# Altium PCB Board22.PcbDoc
Units mm, origin at the board's own origin, x right, y up, seen from the top; angles counter-clockwise.
Board outline 45 x 60 mm, 2 copper layers (Top Layer, Bottom Layer); 20 components, 21 nets, 61 pads, 10 vias.
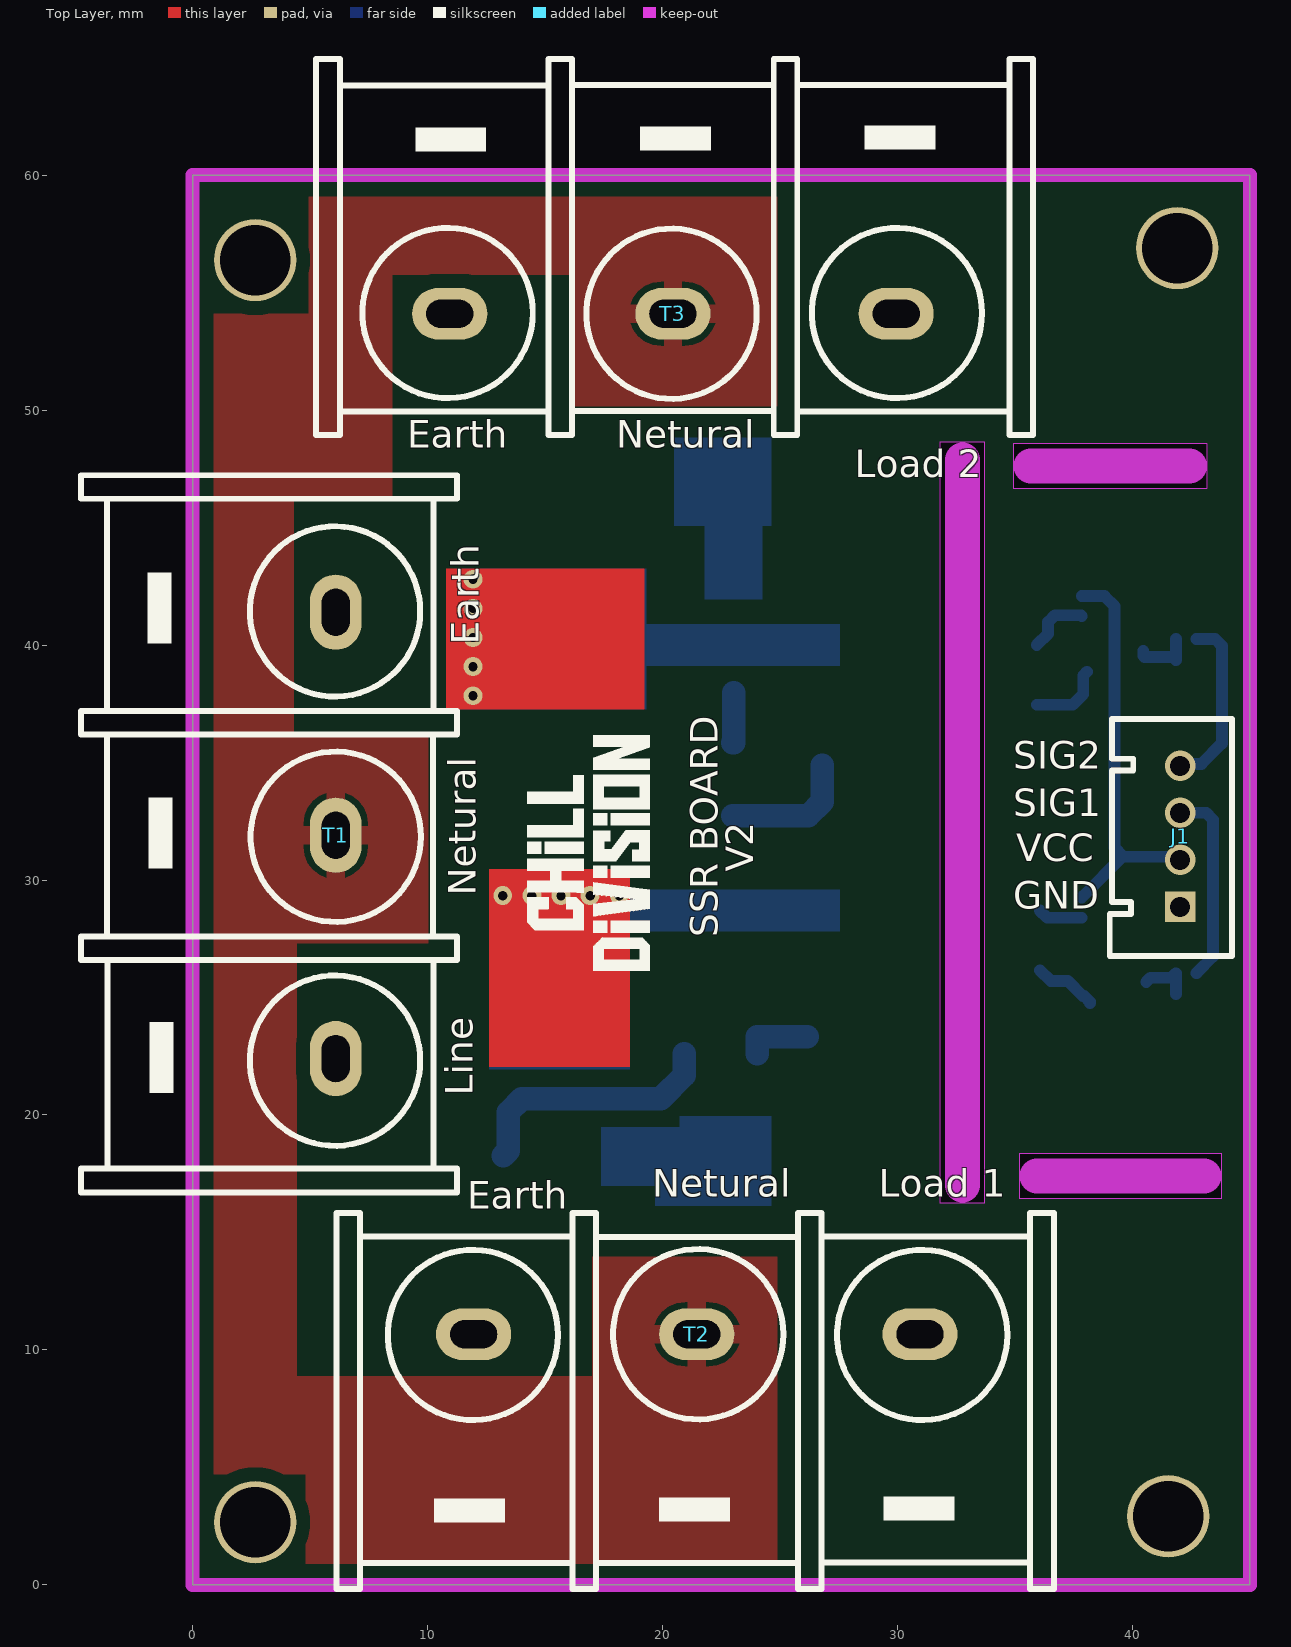
[diagram p0: Top Layer view]
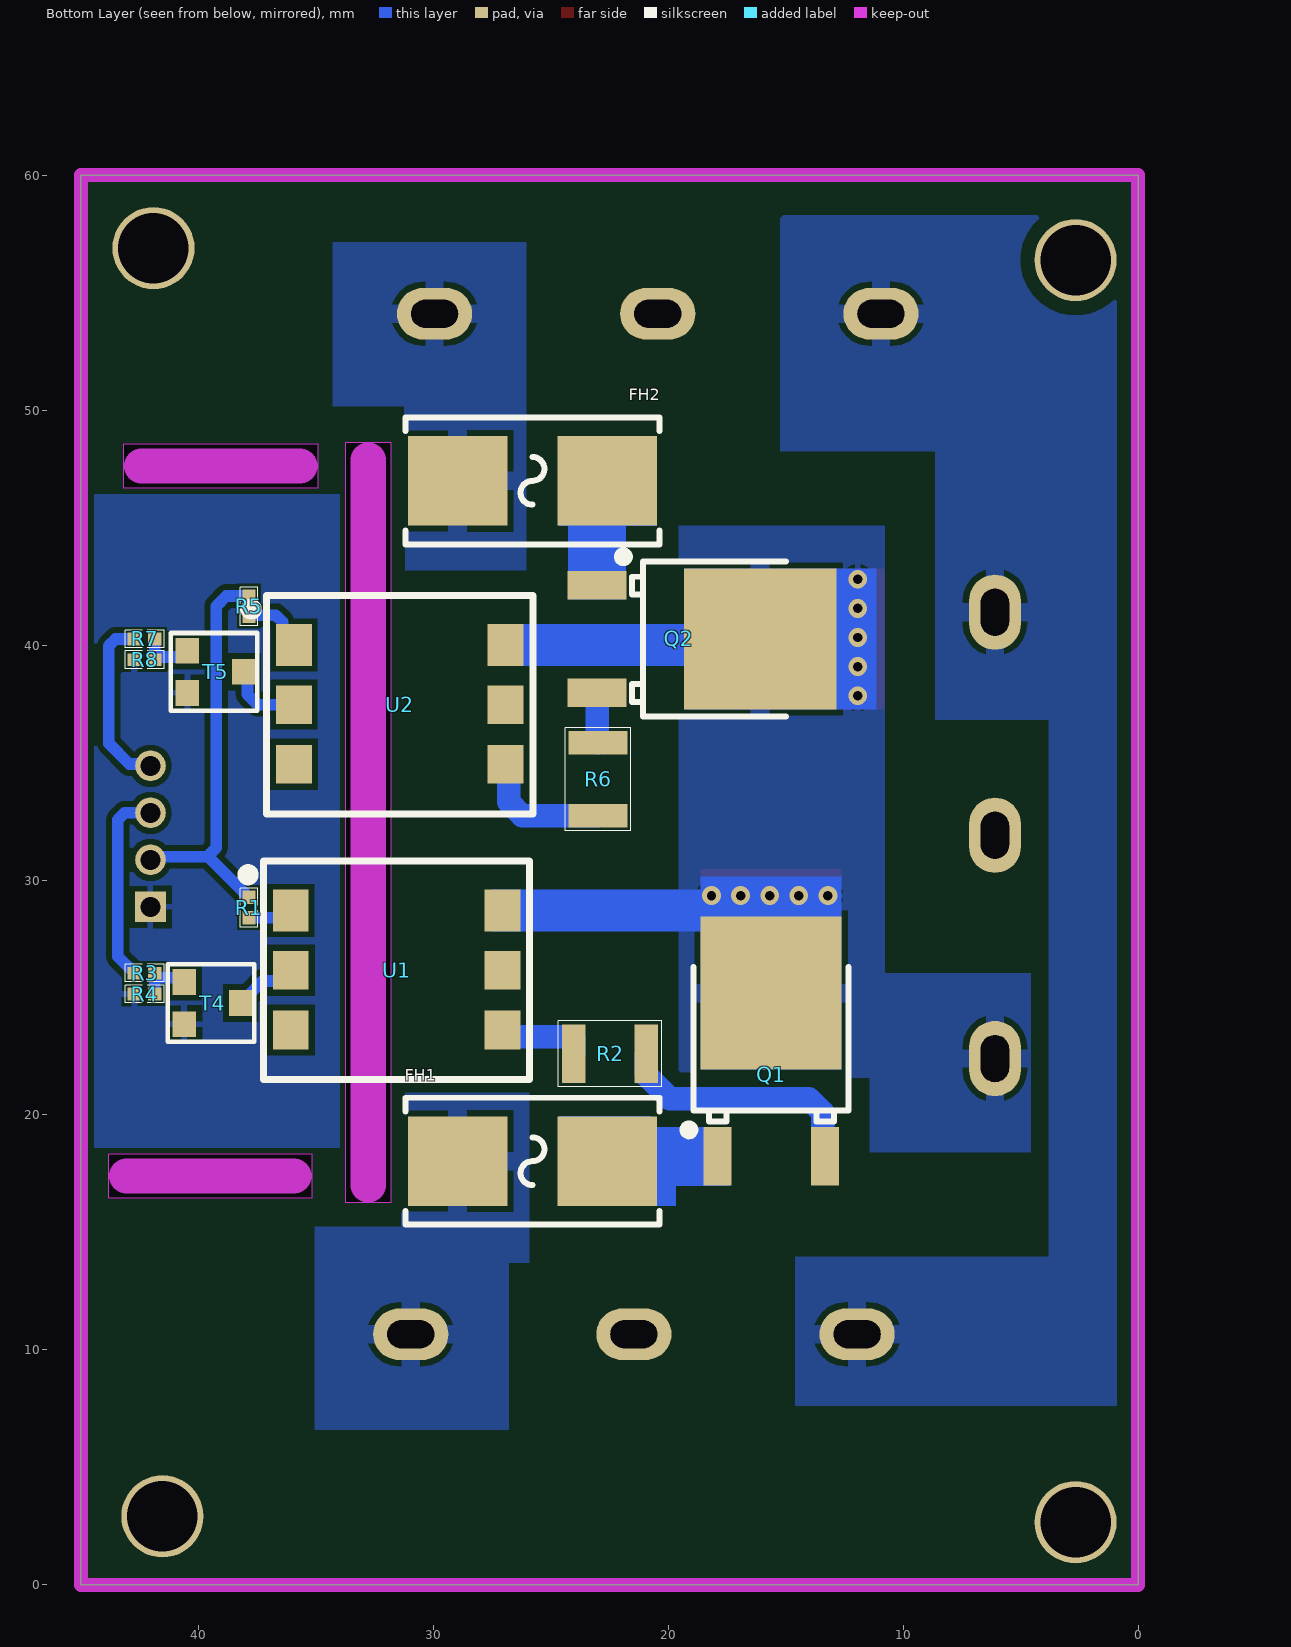
[diagram p1: Bottom Layer view, seen from below]
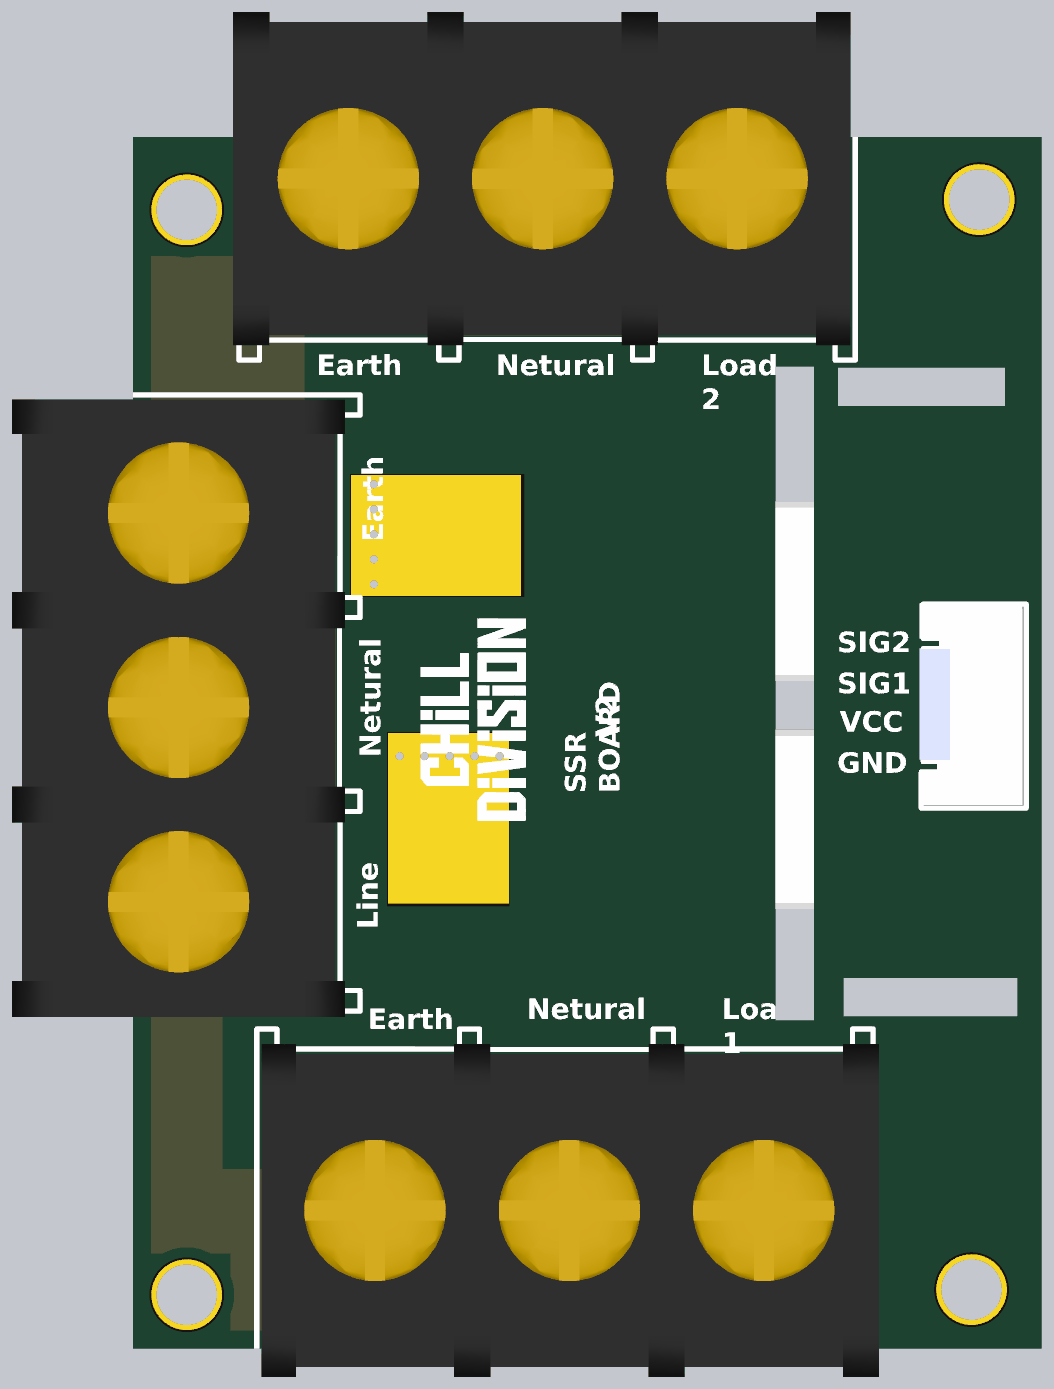
[diagram p2: 3D render of the assembled board from above, using the file's embedded part models]
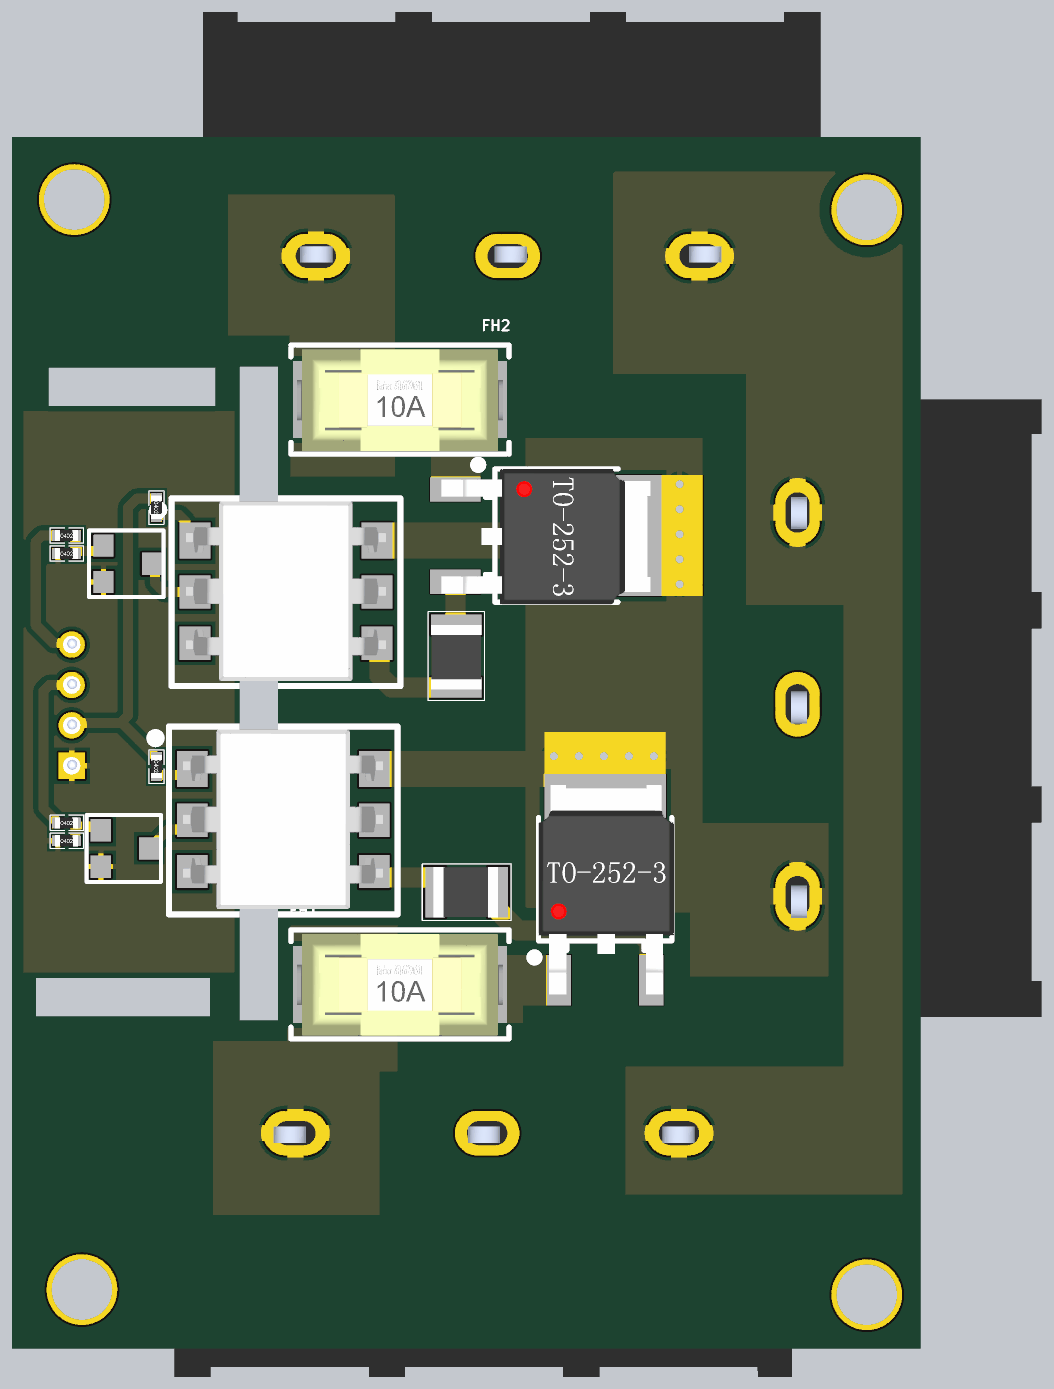
[diagram p3: 3D render of the assembled board from below, using the file's embedded part models]

## Layer stack, top to bottom
Top Solder: solder mask 0.0102, Solder Resist, Dk 3.5
Top Layer: signal copper 0.0356
Dielectric 1: dielectric 0.32, FR-4, Dk 4.8
Bottom Layer: signal copper 0.0356
Bottom Solder: solder mask 0.0102, Solder Resist, Dk 3.5

## Board outline
0,0 0,60 45,60 45,0
cut-out: 34.925,48.578 34.925,46.672 43.18,46.672 43.18,48.578
cut-out: 35.179,18.351 35.179,16.447 43.815,16.447 43.815,18.351
cut-out: 33.718,48.641 31.813,48.641 31.813,16.256 33.718,16.256

## Design rules (kind name [scope] priority, off if disabled: settings)
Clearance Clearance_1 [InNamedPolygon('NETURAL_L01_P004') Or InNamedPolygon('EARTH_L02_P001') Or InNamedPolygon('LINE_L02_P000') Or InNamedPolygon('LOAD_1_L02_P003') Or InNamedPolygon('LOAD_2_L02_P002')] p1: gap=0.6 ignorepadtopadclearanceinfootprint=FALSE
Clearance [All] p2: gap=0.254 ignorepadtopadclearanceinfootprint=FALSE except(0: Arc-Hole Track-Hole SMDPad-Hole THPad-Hole Via-Hole Fill-Hole Poly-Hole Region-Hole Text-Hole)
PolygonConnect PolygonConnect_1 [All vs IsNamedPolygon('NETURAL_L01_P004') Or IsNamedPolygon('EARTH_L02_P001') Or IsNamedPolygon('LINE_L02_P000') Or IsNamedPolygon('LOAD_1_L02_P003') Or IsNamedPolygon('LOAD_2_L02_P002')] p1: thpad.connectstyle=Relief thpad.reliefconductorwidth=0.8 thpad.reliefentries=4 thpad.polygonreliefangle="90 Angle" thpad.airgapwidth=0.254 smdpad.connectstyle=Relief smdpad.reliefconductorwidth=0.8 smdpad.reliefentries=4 smdpad.polygonreliefangle="90 Angle" smdpad.airgapwidth=0.254 via.connectstyle=Relief via.reliefconductorwidth=0.254 via.reliefentries=4 via.polygonreliefangle="90 Angle" via.airgapwidth=0.254
PolygonConnect [All] p2: connectstyle=Relief reliefconductorwidth=0.254 reliefentries=4 polygonreliefangle="90 Angle" airgapwidth=0.254
RoutingVias [All] p1: holewidth=0.711 width=1.27 viastyle="Through Hole" minholewidth=0.711 minwidth=1.27 maxholewidth=0.711 maxwidth=1.27
SolderMaskExpansion [All] p1: expansion=0.102 istentingtop=FALSE
Width [All] p1: maxlimit=2 minlimit=0.4 preferedwidth=1
30 further rules are at their usual default settings.

## Components (designator, comment, footprint, x,y, rotation, side; value= is the part's Value field where it differs from the comment)
FH1 "XF-154" FUSE-SMD_L10.5-W5.1 25.781,18.034 r180 bottom
FH2 "XF-154" FUSE-SMD_L10.5-W5.1 25.781,46.99 r180 bottom
J1 "Header 4P*2mm" CONN-TH_4P-P2.00_HX20020-4A_2 42.037,28.861 r270 top
Q1 "BT136S-800E,118" TO-252-3_L6.6-W6.1-P4.57-LS9.9-BR-CW 15.621,21.717 r270 bottom
Q2 "BT136S-800E,118" TO-252-3_L6.6-W6.1-P4.57-LS9.9-BR-CW 19.558,40.259 r0 bottom
R1 "0402 Resistor" R0402 37.846,28.829 r270 bottom
R2 "330R / 0.5W" R1210 22.479,22.606 r0 bottom
R3 "0402 Resistor" R0402 42.291,26.035 r180 bottom
R4 "0402 Resistor" R0402 42.291,25.146 r180 bottom
R5 "0402 Resistor" R0402 37.846,41.656 r270 bottom
R6 "330R / 0.5W" R1210 22.987,34.29 r270 bottom
R7 "0402 Resistor" R0402 42.291,40.259 r180 bottom
R8 "0402 Resistor" R0402 42.291,39.37 r180 bottom
T1 "Header 3P*9.5mm" "3P,9.5mm Terminal Block" 6.096,31.902 r270 top
T2 "Header 3P*9.5mm" "3P,9.5mm Terminal Block" 21.463,10.668 r0 top
T3 "Header 3P*9.5mm" "3P,9.5mm Terminal Block" 20.447,54.102 r180 top
T4 "MMBT3904 Transistor" MMBT3904 39.395,24.765 r180 bottom
T5 "MMBT3904 Transistor" MMBT3904 39.268,38.862 r180 bottom
U1 "MOC3051SM" OPTOTRIAC_SMD_6PIN 31.563,26.162 r270 bottom
U2 "MOC3051SM" OPTOTRIAC_SMD_6PIN 31.429,37.465 r270 bottom

## Footprints (in the part's own frame and the unit in brackets; to place one, negate y for a bottom-side part, rotate by r counter-clockwise, add the part's x,y. Pads: shape width x height; smd on the part's side, far side on the other; paste and mask are expansions set on the pad)
"3P,9.5mm Terminal Block" [mm]
  oval 3.2x2.2 hole 1.2 slot 2 at 0 deg: 1(-9.5,0) 2(0,0) 3(9.5,0)
  silkscreen extent -15.33,-10.85 15.19,5.16, body extent -15.08,-12.08 15.49,4.42, height 18.5
CONN-TH_4P-P2.00_HX20020-4A_2 [mm]
  rect 1.3x1.3 hole 0.85: 1(0,0)
  round 1.3 hole 0.85: 2(-2,0) 3(-4,0) 4(-6,0)
  silkscreen extent -8,-3 2.1,2.2, body extent -8.05,-3.08 1.95,2.02, height 8
FUSE-SMD_L10.5-W5.1 [mm]
  rect 4.24x3.81 smd paste+0 mask+0: 1(-3.185,0) 2(3.185,0)
  silkscreen extent -5.4,-2.7 5.4,2.7, body extent -5.11,-2.54 5.1,2.49, height 7.46
MMBT3904 [mm] "SOT23, 3-Leads, Body 2.90x2.45mm, Pitch 0.90mm, IPC Medium Density"
  rect 1x1.1 smd: B(-1.2,0.9) C(1.2,0) E(-1.2,-0.9)
  silkscreen extent -1.91,-1.65 1.78,1.65, body extent -0.7,-1.5 0.7,1.5, height 1.1
OPTOTRIAC_SMD_6PIN [mm]
  rect 1.78x1.52 smd mask+0.102: 1(-2.54,-4.505) 6(-2.54,4.505)
  rect 1.65x1.52 smd mask+0.102: 2(0,-4.505) 3(2.54,-4.505) 4(2.54,4.505) 5(0,4.505)
  silkscreen extent -4.64,-6.52 4.66,5.66, body extent -4.48,-4.95 4.41,4.95, height 5.93
R0402 [mm]
  rect 0.566x0.54 smd paste-100 mask+0.051: 1(-0.433,0) 2(0.433,0)
  silkscreen extent -0.81,-0.37 0.84,0.38, body extent -0.58,-0.28 0.58,0.28, height 0.41
R1210 [mm] "Chip Capacitor, 2-Leads, Body 4.35x3.15mm, IPC Medium Density"
  rect 1x2.5 smd mask+0.102: 1(-1.55,0) 2(1.55,0)
  silkscreen extent -2.2,-1.4 2.2,1.4, body extent -1.55,-1.25 1.65,1.25, height 1.5
TO-252-3_L6.6-W6.1-P4.57-LS9.9-BR-CW [mm]
  rect 2.5x1.2 smd paste+0 mask+0.05: 1(3.475,-2.286) 3(3.475,2.286)
  rect 6.5x6 smd paste+0 mask+0.05: 2(-3.475,0)
  silkscreen extent -4.57,-3.7 2.55,3.3, body extent -6.18,-3.3 4.17,3.4, height 2.41

## Part data
FH1 FH2: "C41371861  ,  C136382", JLCPCB Part Class="Extended Part", Manufacturer=XFCN(兴飞), Add into BOM=yes, Convert to PCB=yes, Datasheet=https://atta.szlcsc.com/upload/public/pdf/source/20240828/54540296E604CB321541E8B6C3E496A3.pdf, Device=XF-154, LCSC Part Name=XF-154, Manufacturer Part=XF-154, Supplier=LCSC, Supplier Footprint=SMD, Supplier Part=C41371861, Symbol=XF-154
J1: library part ZX-HY2.0-4PZZ, "C42372479", Colour=White, Current Rating (Max)=2A, Flame Retardant Rating=UL94V-0, JLCPCB Part Class="Extended Part", LCSC Part Name="1x4P 间距:2mm 直插 系列:HY 配套胶壳型号：ZX-HY2.0-4PJK 配套端子型号：ZX-HY2.0-DZ 配套杜邦线型号：ZX-HY2.0-4PBXC", Manufacturer=Megastar(兆星), Operating Temperature Range=-25℃~+85℃, Rated Voltage (Max)=250V, Add into BOM=yes, Contact Material=Brass, Contact Plating=Tin, Convert to PCB=yes, Datasheet=https://atta.szlcsc.com/upload/public/pdf/source/20241025/5A7CD93910E89EF197073334521200FC.pdf, Device=ZX-HY2.0-4PZZ, Manufacturer Part=ZX-HY2.0-4PZZ, Mounting Style="Direct Insert", Number of Pins=4P, Number of PINs Per Row=4, Number of Rows=1, Pins Structure=1x4P, Pitch=2mm, Plastic Material=-, Reference Series=HY, Row Spacing=-, Supplementary Features=-, Supplier=LCSC, Supplier Footprint=插件,P=2mm, Supplier Part=C7429580, Symbol=ZX-HY2.0-4PZZ, X-Length of Bottom Edge on Board (Spacing Line)=10mm, Y-Width of Bottom Edge on Board=5.1mm, Z-Height of the Board=8mm
Q1 Q2: "Triac", Gate Trigger   Voltage (Vgt)=1.5V, Gate Trigger Current(Igt)=10mA, Holding Current (Ih)=15mA, JLCPCB Part Class="Extended Part", Manufacturer=WeEn(瑞能), Operating Temperature=-, Peak Repetitive Off?State Voltage (Vdrm)=800V, RMS On-State Current(It (rms))=4A, Add into BOM=yes, Convert to PCB=yes, Datasheet=https://atta.szlcsc.com/upload/public/pdf/source/20200604/C581422_C791797B81F6B31C38BE664CA17CBB1A.pdf, Device=BT136S-800E,118, LCSC Part Name=BT136S-800E,118, Manufacturer Part=BT136S-800E,118, SCR Type=-, Supplier=LCSC, Supplier Footprint=DPAK, Supplier Part=C581422, Symbol=BT136S-800E,118
R2 R6: library part AC1210FR-07330RL, "C2933817", Case Code (Imperial)=1210, Case Code (Metric)=3225, Manufacturer=Yageo, Max Operating Temperature=155°C, Max Power Dissipation=500mW, Min Operating Temperature=-55°C, Resistance=330R, Supplier Part Number 1=603-AC1210FR-07330RL, Temperature Coefficient=100ppm/°C, Tolerance=1%, Voltage Rating=200V, Case/Package=1210, Category="Chip SMD Resistors", ComponentLink1Description=http://www.mouser.com/ds/2/447/yageodocoutput-1111992.pdf?src-supplier=Mouser, ComponentLink1URL=http://www.mouser.com/ds/2/447/yageodocoutput-1111992.pdf?src-supplier=Mouser, ComponentLink2Description=http://www.yageo.com/NewPortal/yageodocoutput?fileName=/pdf/R-Chip/PYu-AC_51_RoHS_L_6.pdf&src-supplier=Digi-Key, ComponentLink2URL=http://www.yageo.com/NewPortal/yageodocoutput?fileName=/pdf/R-Chip/PYu-AC_51_RoHS_L_6.pdf&src-supplier=Digi-Key, Features="Moisture Resistant,Automotive AEC-Q200", Height=0.024inch, Length=0.122inch, Manufacturer Part Number=AC1210FR-07330RL, Number of Terminations=2, Packaging="Tape and Reel", Power Rating=500mW, Pricing 1="1=0.30000, 10=0.19100, 50=0.19100, 100=0.06200, 1000=0.04300, 10000=0.03100 (USD)", RoHS=Yes, RoHS Compliant=Yes, Series=AC, Stock 1=2010, Supplier 1=Mouser, Termination=SMD/SMT, Width=2.6mm
T1 T2 T3: library part WJ45C-B-9.5-3P, "C8442", Colour=White, Current Rating (Max)=2A, Flame Retardant Rating=UL94V-0, JLCPCB Part Class="Extended Part", LCSC Part Name="1x4P 间距:2mm 直插 系列:HY 配套胶壳型号：ZX-HY2.0-4PJK 配套端子型号：ZX-HY2.0-DZ 配套杜邦线型号：ZX-HY2.0-4PBXC", Manufacturer=Megastar(兆星), Manufacturer Part=ZX-HY2.0-4PZZ, Operating Temperature Range=-25℃~+85℃, Rated Voltage (Max)=250V, Add into BOM=yes, Contact Material=Brass, Contact Plating=Tin, Convert to PCB=yes, Datasheet=https://atta.szlcsc.com/upload/public/pdf/source/20241025/5A7CD93910E89EF197073334521200FC.pdf, Device=ZX-HY2.0-4PZZ, Mounting Style="Direct Insert", Number of Pins=4P, Number of PINs Per Row=4, Number of Rows=1, Pins Structure=1x4P, Pitch=2mm, Plastic Material=-, Reference Series=HY, Row Spacing=-, Supplementary Features=-, Supplier=LCSC, Supplier Footprint=插件,P=2mm, Supplier Part=C7429580, Symbol=ZX-HY2.0-4PZZ, X-Length of Bottom Edge on Board (Spacing Line)=10mm, Y-Width of Bottom Edge on Board=5.1mm, Z-Height of the Board=8mm
U1 U2: "Triac Driver Optocoupler, 6-Pin DIP Random-Phase", Case/Package=SMD/SMT, Forward Current=60mA, Forward Voltage=1.18V, Hold Current=220uA, Isolation Voltage=7.5kV, Manufacturer="ON Semiconductor / Fairchild", Max Input Voltage=1.5V, Max Operating Temperature=85°C, Min Operating Temperature=-40°C, Nominal Input Voltage=1.15V, Package Quantity=1000, Power Dissipation=330mW, Reverse Breakdown Voltage=3V, Supplier Part Number 1=512-MOC3051SM, Approvals=UR, Category=Optocouplers, ComponentLink1Description=https://datasheet.ciiva.com/8097/moc3052m-8097782.pdf?src-supplier=Avnet, ComponentLink1URL=https://datasheet.ciiva.com/8097/moc3052m-8097782.pdf?src-supplier=Avnet, ComponentLink2Description=https://datasheet.ciiva.com/17022/moc3051m-17022507.pdf?src-supplier=Future+Electronics, ComponentLink2URL=https://datasheet.ciiva.com/17022/moc3051m-17022507.pdf?src-supplier=Future+Electronics, Isolation Voltage-Max=7.5kV, Lead Free="Lead Free", Manufacturer Part Number=MOC3051SM, Mount="Surface Mount", Number of Channels=1, Number of Circuits=1, Number of Elements=1, Number of Pins=6, Packaging=Bulk, Pricing 1="1=1.20000, 10=0.76100, 50=0.76100, 100=0.56400, 1000=0.40000, 10000=0.38200 (USD)", Radiation Hardening=No, RoHS=Yes, RoHS Compliant=Yes, Series=-, Stock 1=1665, Supplier 1=Mouser, Weight=0.81g
T4 T5: Created By=NourAldin

## Free pads (board coordinates)
  round 3.5 hole 3: ""(2.667,2.667) ""(2.667,56.388) ""(41.529,2.921) ""(41.91,56.896)

## Via types
v1: diameter 0.8, hole 0.4, Top Layer to Bottom Layer, 10 vias

## Nets (pads, with @x,y where several pads share a name; then routed paths per layer and width w, separated by ;. In a path a pad name is that pad's centre, name@x,y a point inside that pad or via, vN(x,y) a via of type N, cw(c..) or ccw(c..) an arc to the next point about the centre after c; other vN are vias at no path point)
Earth: T1.1 T2.1 T3.3
GND: J1.1 R4.1 R8.1 T4.E T5.E
Line: Q1.2 Q2.2 T1.3 U1.6 U2.6
  other v1: 13.208,29.337 14.446,29.337 15.684,29.337 16.923,29.337 18.161,29.337 11.938,37.846 11.938,39.084 11.938,40.322 11.938,41.561 11.938,42.799
"Load 1": FH1.1 T2.3
"Load 2": FH2.1 T3.1
NetFH1_2: FH1.2 Q1.1
NetFH2_2: FH2.2 Q2.1
NetQ1_3: Q1.3 R2.1 | length 11
  Bottom Layer w1: Q1.3@13.235,18.271 13.433,18.469 13.433,20.115 14.019,20.701 19.939,20.701 20.929,21.691 R2.1
NetQ2_3: Q2.3 R6.1 | length 2.2
  Bottom Layer w1: R6.1 23.033,35.84 Q2.3
NetR1_2: R1.2 U1.1 | length 1.9
  Bottom Layer w0.5: U1.1 36.374,28.396 R1.2
NetR2_2: R2.2 U1.4 | length 2.9
  Bottom Layer w1: R2.2 24.029,23.331 26.169,23.331
NetR3_2: R3.2 R4.2 T4.B | length 2.3
  Bottom Layer w0.5: T4.B 40.769,25.839 41.649,25.839 41.845,26.035 R3.2 R4.2
NetR5_2: R5.2 U2.1 | length 2.8
  Bottom Layer w0.5: U2.1 36.412,40.483 36.412,40.982 36.705,41.275 37.794,41.275 37.813,41.256 37.826,41.256 37.846,41.236 R5.2
NetR6_2: R6.2 U2.4 | length 5.6
  Bottom Layer w1: R6.2 26.211,32.74 26.797,33.326 U2.4@26.797,34.893
NetR7_2: R7.2 R8.2 T5.B | length 2.6
  Bottom Layer w0.5: T5.B 40.468,39.542 40.513,39.497 41.718,39.497 41.845,39.37 R8.2 R7.2
NetT4_C: T4.C U1.2 | length 2.7
  Bottom Layer w0.5: U1.2 36.526,25.704 37.256,25.704 37.895,25.065 37.945,25.065 38.195,24.815 T4.C
NetT5_C: T5.C U2.2 | length 3.2
  Bottom Layer w0.5: U2.2 37.465,37.465 37.91,37.91 37.91,38.703 T5.C
Netural: T1.2 T2.2 T3.2
Signal1: J1.3 R3.1 | length 8.4
  Bottom Layer w0.5: J1.3 43.141,32.861 43.434,32.568 43.434,26.745 42.757,26.068 42.757,26.055 42.737,26.035 R3.1
Signal2: J1.4 R7.1 | length 7.5
  Bottom Layer w0.5: J1.4 42.114,34.938 42.939,34.938 43.815,35.814 43.815,39.966 43.522,40.259 R7.1
VCC: J1.2 R1.1 R5.1 | length 17.4
  Bottom Layer w0.5: R1.1 37.846,29.275 37.866,29.295 37.879,29.295 39.572,30.988 39.624,30.988 ; R5.1 38.81,42.089 39.243,41.656 39.243,31.369 39.624,30.988 ; J1.2 41.91,30.988 39.624,30.988
pads on no net: U1.3 U1.5 U2.3 U2.5

## Polygon pours and split planes (outlines as drawn)
GND on Bottom Layer "GND_L02_P005" (solid, pour order 5): 33.782,46.426 44.577,46.426 44.577,18.613 33.782,18.613
"Load 1" on Bottom Layer "LOAD_1_L02_P003" (solid, pour order 3): 31.369,20.955 25.908,20.955 25.908,13.716 26.797,13.716 26.797,6.604 35.052,6.604 35.052,15.24 31.369,15.24
"Load 2" on Bottom Layer "LOAD_2_L02_P002" (solid, pour order 2): 34.29,57.15 34.29,50.165 31.242,50.165 31.242,43.18 26.035,43.18 26.035,57.023 25.908,57.15
Earth on Bottom Layer "EARTH_L02_P001" (solid, pour order 1): 15.113,58.293 15.24,58.166 15.24,48.26 8.636,48.26 8.636,36.83 3.81,36.83 3.81,13.97 14.605,13.97 14.605,7.62 0.762,7.62 0.762,58.293
Line on Bottom Layer "LINE_L02_P000" (solid, pour order 0): 4.572,26.035 4.572,18.415 11.43,18.415 11.43,21.59 19.558,21.59 19.558,45.085 10.795,45.085 10.795,26.035
Netural on Top Layer "NETURAL_L01_P004" (solid, pour order 4): 17.018,13.97 24.892,13.97 24.892,0.635 4.826,0.635 4.826,4.699 0.635,4.699 0.635,54.102 4.953,54.102 4.953,59.436 24.892,59.436 24.892,50.165 16.256,50.165 16.256,55.753 8.509,55.753 8.509,46.355 4.318,46.355 4.318,36.195 9.906,36.195 10.033,36.068 10.033,27.305 4.445,27.305 4.445,8.89 17.018,8.89

## Keep-outs
Keep-Out Layer:
  lines w0.6: 0,0 0,60 45,60 45,0 0,0
  lines w1.5: 32.766,17.018 32.766,47.879 ; 35.687,47.625 42.418,47.625 ; 35.941,17.399 43.053,17.399

## Other copper
Top Layer:
  rectangle net Line: 12.625,22.047 18.618,30.48
  region net Line: 19.228,37.263 19.228,43.256 10.795,43.256 10.795,37.263
Bottom Layer:
  rectangle net Line: 15.621,39.116 27.559,40.894
  rectangle net Line: 17.526,27.813 27.559,29.591
  region net Line: 19.331,37.263 19.331,43.256 11.131,43.256 11.131,37.263
  rectangle net Line: 12.625,21.944 18.618,30.144
  region net NetFH1_2: 17.399,19.488 17.399,16.992 19.685,16.992 19.685,16.129 24.638,16.129 24.638,19.939 20.742,19.939 20.742,19.488
  region net NetFH2_2: 20.498,48.835 24.638,48.835 24.638,45.085 24.257,45.085 24.257,41.944 21.801,41.944 21.801,45.085 20.498,45.085

## Silkscreen, mask and mechanical layers (free items; w line width, h text height)
Top Overlay:
  drawing of 17 lines, arcs and shapes, not listed
  text "Earth" at 9.144,48.016 h2
  text "Netural" at 18.034,48.016 h2
  text "Load 2" at 28.194,46.759 h2
  text "Earth" at 12.563,40.005 h2 r90
  text "SIG2" at 34.925,34.361 h2
  text "SIG1" at 34.925,32.329 h2
  text "VCC" at 35.052,30.424 h2
  text "V2" at 24.257,30.353 h2 r90
  text "Netural" at 12.436,29.337 h2 r90
  text "GND" at 34.925,28.392 h2
  text "SSR BOARD" at 22.733,27.559 h2 r90
  text "Line" at 12.309,20.828 h2 r90
  text "Netural" at 19.558,16.139 h2
  text "Load 1" at 29.21,16.139 h2
  text "Earth" at 11.684,15.631 h2
Top Solder:
  rectangle: 12.573,21.893 18.661,30.526
  region: 19.382,37.211 19.382,43.299 10.749,43.299 10.749,37.211
Bottom Solder:
  rectangle: 12.625,22.344 18.618,30.544
  region: 18.931,37.263 18.931,43.256 10.731,43.256 10.731,37.263